# Altium PCB MAX96717_EVB_revC.PcbDoc (part 2 of 2)
Units mm, origin at the board's own origin, x right, y up, seen from the top; angles counter-clockwise.
Board outline 60 x 50 mm, 4 copper layers (Top Layer, Mid Layer 1, Mid Layer 2, Bottom Layer), stack 1.586 mm thick; 104 components, 57 nets, 332 pads, 116 vias.
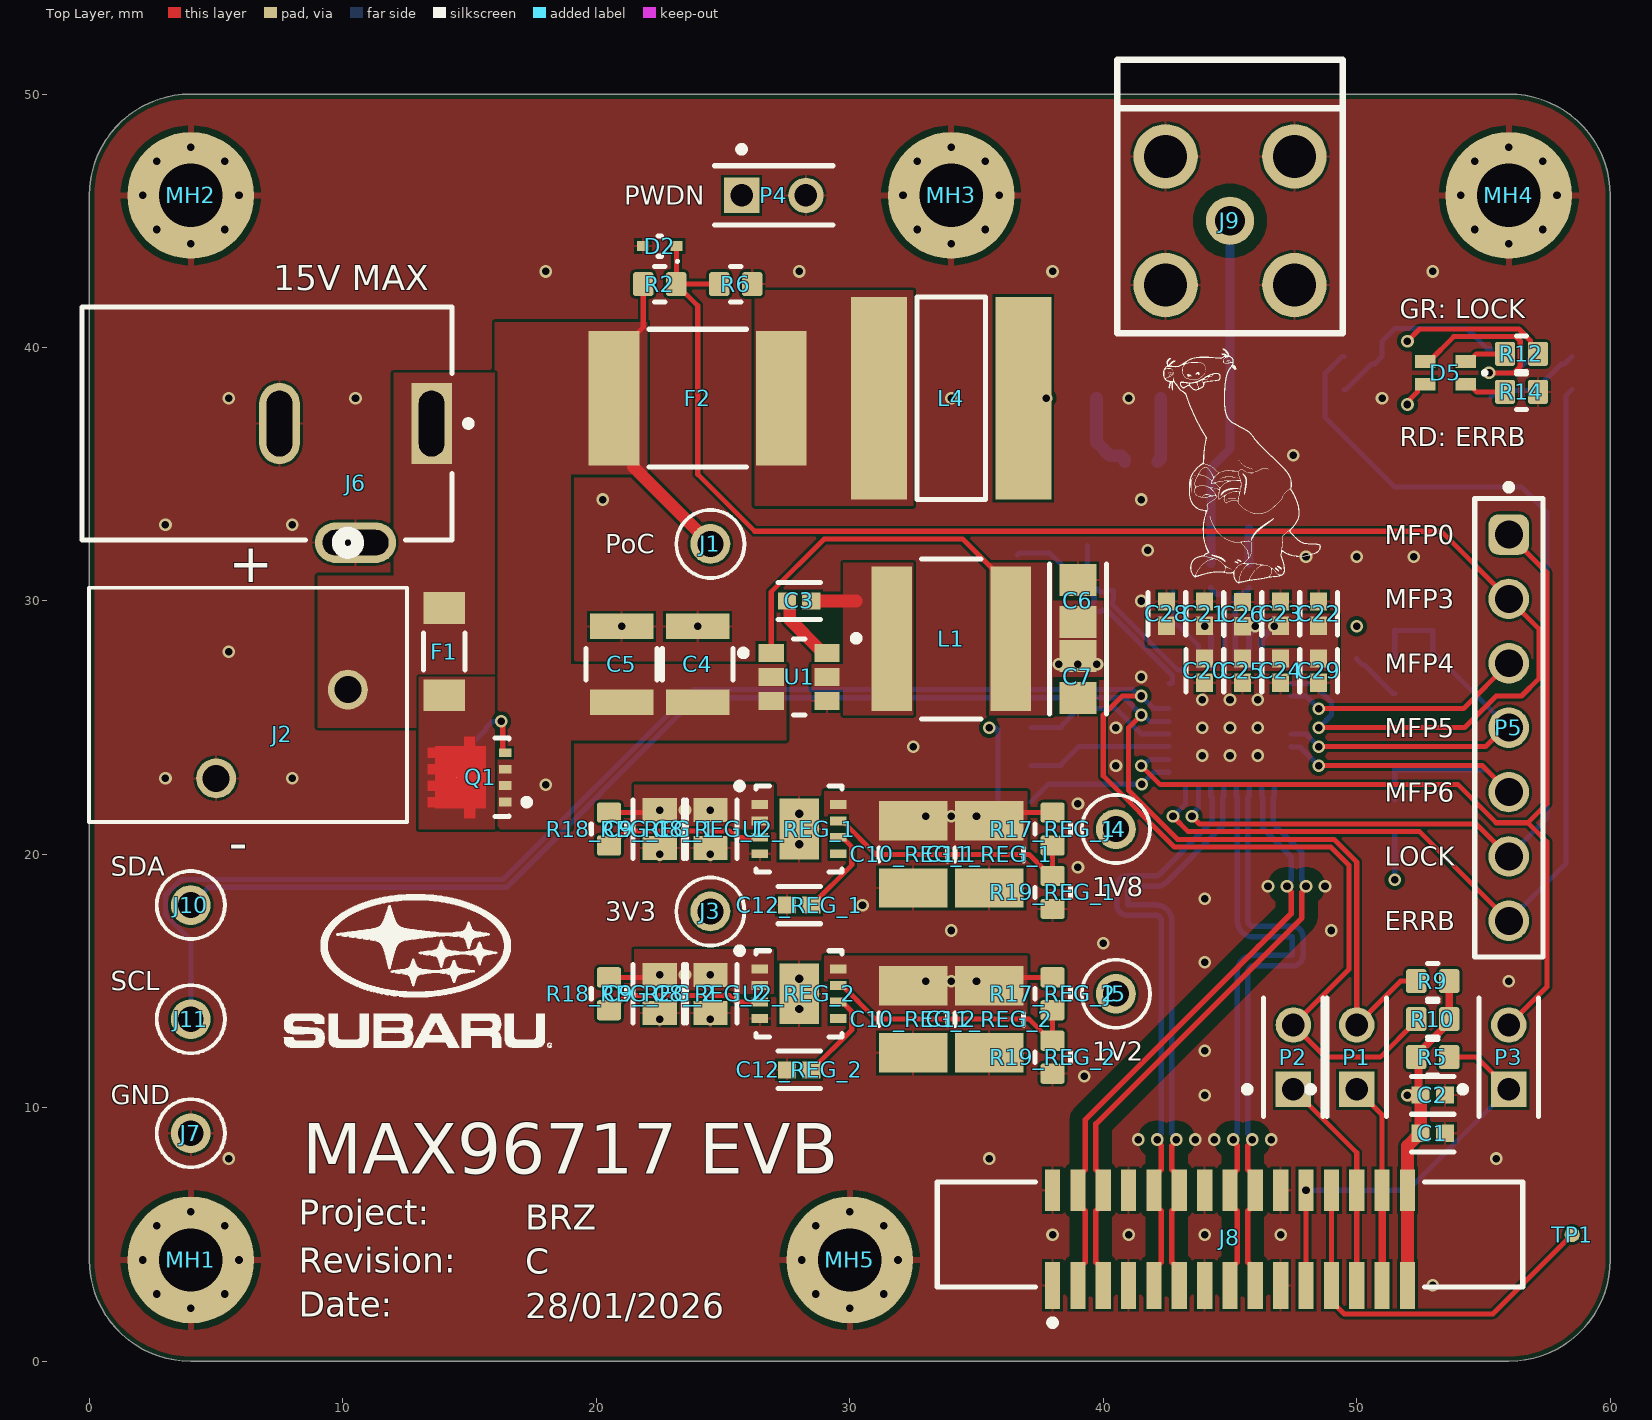
[diagram p0: Top Layer view]

## Via types
v1: diameter 0.5, hole 0.3, Top Layer to Bottom Layer, tented both sides, 112 vias
v2: diameter 0.66, hole 0.33, Top Layer to Bottom Layer, tented both sides, 4 vias

## Nets (pads, with @x,y where several pads share a name; then routed paths per layer and width w, separated by ;. In a path a pad name is that pad's centre, name@x,y a point inside that pad or via, vN(x,y) a via of type N, cw(c..) or ccw(c..) an arc to the next point about the centre after c; other vN are vias at no path point) (continued)
NetR18_REG_1_2: (continued)
  Top Layer w0.2: R18_REG_1.2 20.575,20.35 21.152,20.927 25.259,20.927 25.51,20.675 U2_REG_1.3
NetR18_REG_2_2: R18_REG_2.2 U2_REG_2.3 | length 6.3
  Top Layer w0.2: R18_REG_2.2 20.575,13.85 21.152,14.427 25.259,14.427 25.51,14.175 U2_REG_2.3
NetR22_2: R22.2 U3.10 | length 3.4
  Bottom Layer w0.2: R22.2 42.75,29.25 43.75,28.25 U3.10
NetR23_1: R23.1 R24.2 U3.3 | length 5.7
  Bottom Layer w0.2: R23.1 R24.2 ; R24.2@38.35,23.575 39.025,24.25 U3.3
NetR26_1: R26.1 R27.2 U3.4 | length 6.2
  Bottom Layer w0.2: R26.1 R27.2 38.35,25.075 39.025,25.75 40.5,25.75 41.5,24.75 U3.4
NetU2_REG_1_5: U2_REG_1.5
NetU2_REG_2_5: U2_REG_2.5
PoC_PWR: C4.1 C5.1 D1.1 F2.2 J1.1 Q1.1 Q1.2 Q1.3 R2.2 U1.2 U1.3 | length 12.3
  Top Layer w0.2: F2.2 20.7,39.65 21.85,40.8 R2.2
  Top Layer w0.5: F2.2 21.45,37.25 21.45,35.3 J1.1
  other v1: 18,22.75
RF_OUT: C13.2 J9.1 L3.2 | length 13.8
  Bottom Layer w0.342: C13.2 44.25,35.25 45,36 45,38 J9.1
SIO_N: C14.1 U3.13 | length 3.5
  Bottom Layer w0.217: U3.13 45.25,27.709 45.209,27.75 45.209,30.145 45.336,30.272 45.522,30.272 45.75,30.5 C14.1
SIO_P: C13.1 U3.12 | length 3.5
  Bottom Layer w0.217: C13.1 44.25,30.5 44.478,30.272 44.664,30.272 44.791,30.145 44.791,27.75 44.75,27.709 U3.12
X25_N: C17.1 U3.9 Y1.3 | length 7.4
  Bottom Layer w0.2: Y1.3 39.379,31.47 39.144,31.235 39.144,31.069 39.857,30.357 40.022,30.357 40.078,30.412 C17.1 40.412,30.078 40.357,30.022 40.357,29.857 42.942,27.271 43.227,27.271 43.25,27.294 U3.9
X25_P: C16.1 U3.8 Y1.1 | length 9
  Bottom Layer w0.2: Y1.1 36.692,31.894 37.893,31.894 39.643,30.143 39.643,29.978 39.588,29.922 C16.1 39.922,29.588 39.978,29.643 40.143,29.643 42.729,27.058 42.729,26.773 42.706,26.75 U3.8
pads on no net: U3.7 U3.19 U3.20 U3.23 U3.24

## Polygon pours and split planes (outlines as drawn)
GND on Bottom Layer "GND_L04_P025" (solid, remove dead copper, pour order 25): 0,4 ccw(c4,4) 4,0 56,0 ccw(c56,4) 60,4 60,6 60,46 ccw(c56,46) 56,50 4,50 ccw(c4,46) 0,46
NetL2_2 on Bottom Layer "NETL2_2_L04_P023" (solid, remove dead copper, pour order 23): 41.75,39.5 44,39.5 44,36.5 41.75,36.5
NetC15_1 on Bottom Layer "NETC15_1_L04_P022" (solid, remove dead copper, pour order 22): 40.25,39.5 37,39.5 37,36.5 40.25,36.5
3V3 on Bottom Layer "3V3_L04_P000" (solid, remove dead copper, pour order 0): 50.5,29.5 50.5,27.25 49.5,27.25 49.25,27 46.5,27 46.5,28.5 47.5,29.5 48,29.5
GND on Top Layer "GND_L01_P024" (solid, remove dead copper, pour order 24): 0,4 ccw(c4,4) 4,0 56,0 ccw(c56,4) 60,4 60,6 60,46 ccw(c56,46) 56,50 4,50 ccw(c4,46) 0,46
NetF2_1 on Top Layer "NETF2_1_L01_P021" (solid, remove dead copper, pour order 21): 32.5,33.75 26.25,33.75 26.25,42.25 32.5,42.25
PoC_PWR on Top Layer "POC_PWR_L01_P013" (solid, remove dead copper, pour order 13): 19.5,24.5 19,24.5 19,21 16,21 16,41 22,41 22,35 19,35 19,27.5 19.5,27.5
1V8 on Top Layer "1V8_L01_P004" (solid, remove dead copper, pour order 4): 29,21.5 29.75,21.5 31.25,20 37,20 37,22.5 29,22.5
1V2 on Top Layer "1V2_L01_P005" (solid, remove dead copper, pour order 5): 29,15 29.75,15 31.25,13.5 37,13.5 37,16 29,16
3V3 on Top Layer "3V3_L01_P006" (solid, remove dead copper, pour order 6): 27,14.5 21.5,14.5 21.5,16.25 27,16.25
3V3 on Top Layer "3V3_L01_P007" (solid, remove dead copper, pour order 7): 27,21 21.5,21 21.5,22.75 27,22.75
NetF1_1 on Top Layer "NETF1_1_L01_P012" (solid, remove dead copper, pour order 12): 9,25 9,31 12,31 12,39 16,39 16,27 13,27 13,25
NetF1_2 on Top Layer "NETF1_2_L01_P011" (solid, remove dead copper, pour order 11): 13,27 13,21 16,21 16,27
PoC_PWR on Top Layer "POC_PWR_L01_P010" (solid, remove dead copper, pour order 10): 27.5,27.5 19.5,27.5 19.5,24.5 27.5,24.5
3V3 on Top Layer "3V3_L01_P009" (solid, remove dead copper, pour order 9): 35.5,31.5 35.5,25.5 38,25.5 38,27 40,27 40,30 38,30 38,31.5
NetC3_2 on Top Layer "NETC3_2_L01_P008" (solid, remove dead copper, pour order 8): 28.5,27.5 28.5,26.5 29.75,26.5 29.75,25.5 32.5,25.5 32.5,31.5 29.75,31.5 29.75,27.5
1V8 on Top Layer "1V8_L01_P003" (solid, remove dead copper, pour order 3): 44.75,29.5 41.75,29.5 41.75,28.25 43.25,28.25 43.25,27.25 44.75,27.25
NetC24_1 on Top Layer "NETC24_1_L01_P002" (solid, remove dead copper, pour order 2): 47.75,27.25 44.75,27.25 44.75,29.5 46.25,29.5 46.25,28.25 47.75,28.25
1V2 on Top Layer "1V2_L01_P001" (solid, remove dead copper, pour order 1): 46.25,29.5 46.25,28.25 47.75,28.25 47.75,27.25 49.25,27.25 49.25,29.5
GND on Mid Layer 1 "GND_L02_P020" (solid, remove dead copper, pour order 20): 0,4 ccw(c4,4) 4,0 56,0 ccw(c56,4) 60,4 60,6 60,46 ccw(c56,46) 56,50 4,50 ccw(c4,46) 0,46
1V2 on Mid Layer 1 "1V2_L02_P016" (solid, remove dead copper, pour order 16): 49.25,29.5 49.25,28.25 51,28.25 51,13.5 32.5,13.5 32.5,19.5 41,19.5 45,23.5 45,29.5
1V8 on Mid Layer 1 "1V8_L02_P015" (solid, remove dead copper, pour order 15): 45,23.5 41,19.5 32.5,19.5 32.5,24.5 38,24.5 40.5,27 40.5,29.5 45,29.5
3V3 on Mid Layer 1 "3V3_L02_P014" (solid, remove dead copper, pour order 14): 51,28.25 51,9.5 54.5,9.5 54.5,37.5 55.75,38.75 55.75,39.5 55,39.5 49.75,34.25 28.5,34.25 21.5,27.25 21.5,14.5 27.5,14.5 27.5,22 30,24.5 38,24.5 40.5,27 40.5,29.5 49.25,29.5 49.25,28.25
GND on Mid Layer 2 "GND_L03_P019" (solid, remove dead copper, pour order 19): 0,4 ccw(c4,4) 4,0 56,0 ccw(c56,4) 60,4 60,6 60,46 ccw(c56,46) 56,50 4,50 ccw(c4,46) 0,46

## Other copper
Bottom Layer:
  pour cut-out: 45.7,33.5 44.9,33.5 44.9,33.2 45.7,33.2

## Silkscreen, mask and mechanical layers (free items; w line width, h text height)
Top Overlay:
  drawing of 29 lines, arcs and shapes, not listed
  text "PWDN" at 21.101,45.625 h0.75
  text "15V MAX" at 7.251,42.254 h1
  text "GR: LOCK" at 51.688,41.15 h0.75
  text "RD: ERRB" at 51.688,36.1 h0.75
  text "MFP0" at 51.101,32.245 h0.75
  text "PoC" at 20.351,31.875 h0.75
  text "+" at 5.492,30.738 h1.52
  text "MFP3" at 51.101,29.705 h0.75
  text "MFP4" at 51.101,27.165 h0.75
  text "MFP5" at 51.101,24.625 h0.75
  text "MFP6" at 51.101,22.085 h0.75
  text "-" at 5.492,19.738 h1.52
  text "LOCK" at 51.101,19.545 h0.75
  text "SDA" at 0.851,19.15 h0.75
  text "1V8" at 39.563,18.35 h0.75
  text "3V3" at 20.351,17.375 h0.75
  text "ERRB" at 51.101,17.005 h0.75
  text "SCL" at 0.851,14.65 h0.75
  text "1V2" at 39.563,11.85 h0.75
  text "GND" at 0.851,10.15 h0.75
  text "MAX96717 EVB" at 8.4,7.4 h2
  text "Project:" at 8.25,5.383 h1
  text "BRZ" at 17.2,5.2 h1
  text "Revision:" at 8.25,3.5 h1
  text "C" at 17.2,3.45 h1
  text "Date:" at 8.25,1.75 h1
  text "28/01/2026" at 17.2,1.7 h1
Mechanical 1:
  lines w0.254: 60,6 60,4 cw(c56,4) 56,0 4,0 cw(c4,4) 0,4 0,46 cw(c4,46) 4,50 56,50 cw(c56,46) 60,46 60,6 ; 60,6 60,6